# Altium PCB InterfazRS232Radio.PcbDoc
Units mm, origin at the board's own origin, x right, y up, seen from the top; angles counter-clockwise.
Board outline 40 x 30 mm, 2 copper layers (Top Layer, Bottom Layer); 18 components, 18 nets, 64 pads, 0 vias.
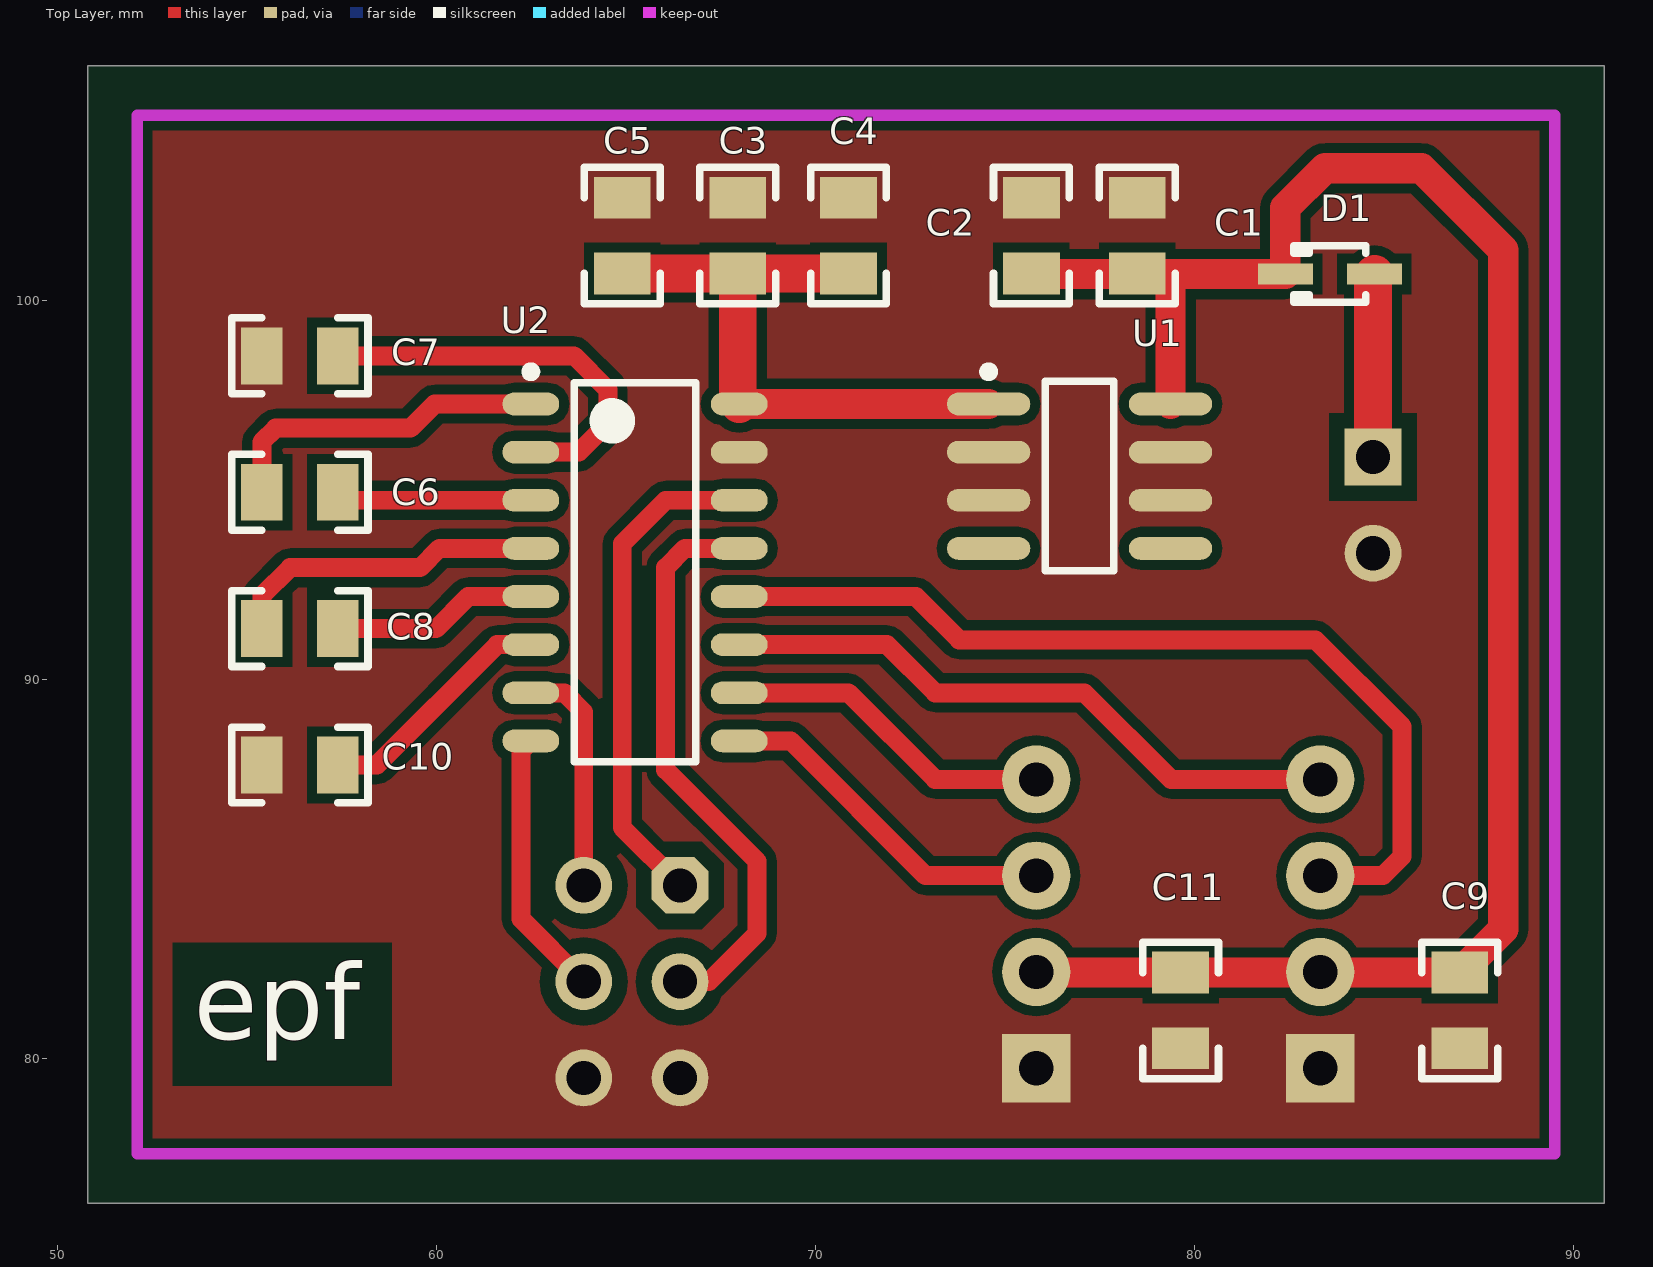
[diagram p0: Top Layer view]
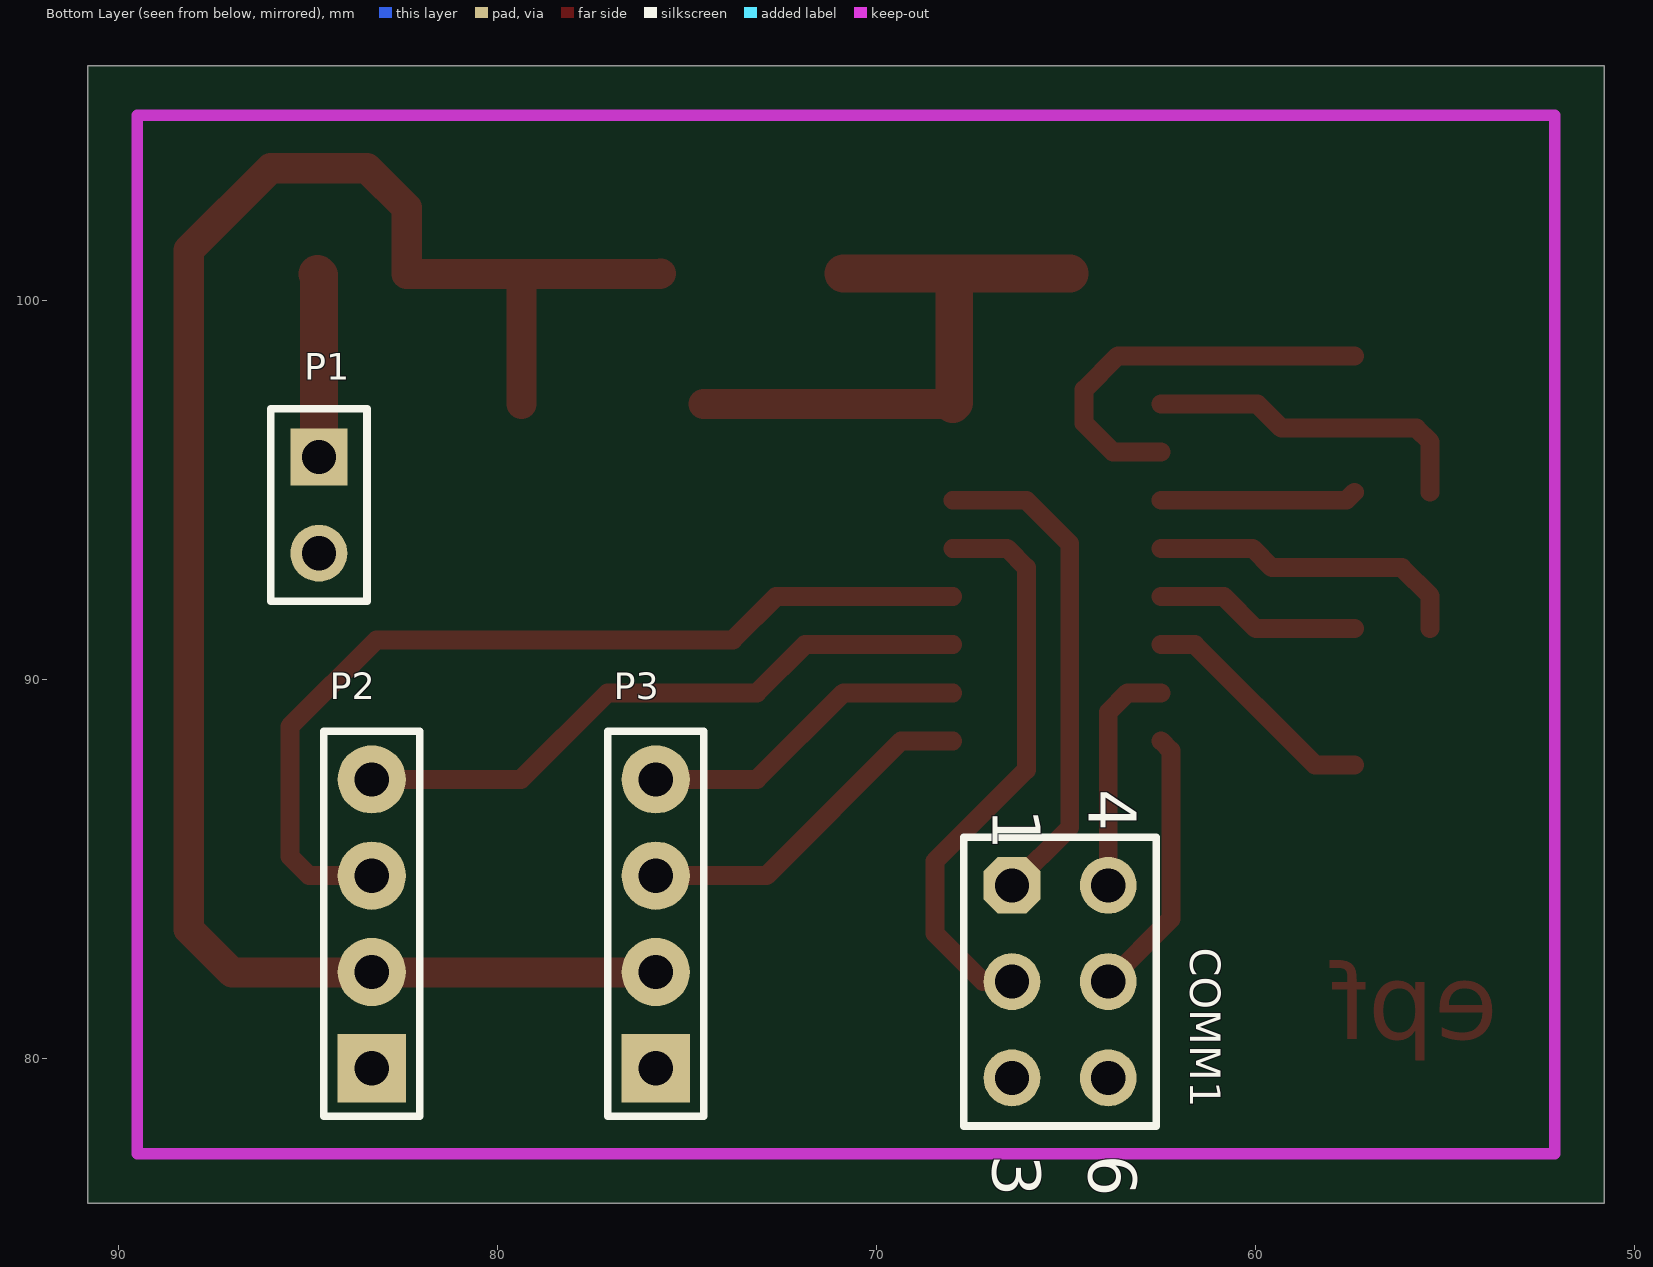
[diagram p1: Bottom Layer view, seen from below]

## Layer stack, top to bottom
Top Layer: signal copper 0.0356
Dielectric: dielectric 0.32, FR-4, Dk 4.8
Bottom Layer: signal copper 0.0356

## Board outline
50.8,76.2 90.8,76.2 90.8,106.2 50.8,106.2

## Design rules (kind name [scope] priority, off if disabled: settings)
Clearance [All] p1: gap=0.254
PlaneConnect [All] p1: planeconnectstyle=Direct reliefexpansion=0.508 reliefentries=4 reliefconductorwidth=0.254 reliefairgap=0.254
PolygonConnect [All] p1: connectstyle=Direct reliefconductorwidth=0.254 reliefentries=4 polygonreliefangle="90 Angle"
RoutingVias [All] p1: holewidth=0.6 width=1 viastyle="Through Hole" minholewidth=0.6 minwidth=0.9 maxholewidth=2 maxwidth=3
SilkscreenOverComponentPads [All] p1: minsilkscreentomaskgap=0.254
SolderMaskExpansion [All] p1: expansion=0.102
Width [All] p1: maxlimit=3 minlimit=0.2 preferedwidth=0.5
26 further rules are at their usual default settings.

## Components (designator, comment, footprint, x,y, rotation, side; value= is the part's Value field where it differs from the comment)
C1 "Capacitor" 0805_CAP 78.486,101.727 r90 top
C2 "Capacitor" 0805_CAP 75.692,101.727 r90 top
C3 "Capacitor" 0805_CAP 67.945,101.727 r90 top
C4 "Capacitor" 0805_CAP 70.866,101.727 r90 top
C5 "Capacitor" 0805_CAP 64.897,101.727 r270 top
C6 "Capacitor" 0805_CAP 56.388,94.954 r0 top
C7 "Capacitor" 0805_CAP 56.388,98.552 r0 top
C8 "Capacitor" 0805_CAP 56.388,91.355 r180 top
C9 "Capacitor" 0805_CAP 86.995,81.28 r270 top
C10 "Capacitor" 0805_CAP 56.388,87.757 r0 top
C11 "Capacitor" 0805_CAP 79.629,81.28 r270 top
COMM1 "AP_COMM" HDR2X3_CEN 66.421,84.582 r270 bottom
D1 "BAS316" SOD-323 83.566,100.711 r180 top
P1 "Header2" HEADER2MACHO 84.709,95.885 r270 bottom
P2 "Header 4" HDR1X4 83.312,79.756 r90 bottom
P3 "Header 4" HDR1X4 75.819,79.756 r90 bottom
U1 "µA78L05ACDR" D008_N 76.962,95.377 r0 top
U2 "MAX3232ESE" SOIC127P602-16BN 65.234,92.837 r0 top

## Footprints (in the part's own frame and the unit in brackets; to place one, negate y for a bottom-side part, rotate by r counter-clockwise, add the part's x,y. Pads: shape width x height; smd on the part's side, far side on the other; paste and mask are expansions set on the pad)
0805_CAP [mm]
  rect 1.1x1.5 smd: 1(-1,0) 2(1,0)
  silkscreen extent -1.8,-1 1.8,1, body extent -1,-0.62 1,0.63, height 0.78
D008_N [mm] "SOIC, 8-Leads, Body 4.9x3.9mm, Pitch 1.27mm, IPC Medium Density"
  oval 2.2x0.6 smd: 1(-2.4,1.905) 2(-2.4,0.635) 3(-2.4,-0.635) 4(-2.4,-1.905) 5(2.4,-1.905) 6(2.4,-0.635) 7(2.4,0.635) 8(2.4,1.905)
  silkscreen extent -2.52,-2.5 0.9,2.88, body extent -2,-2.5 2,2.5, height 1.75
HDR1X4 [mm] "Connector; Header; 4 Position"
  rect 1.8x1.8 hole 0.9: 1(0,0)
  round 1.8 hole 0.9: 2(2.54,0) 3(5.08,0) 4(7.62,0)
  silkscreen extent -1.27,-1.27 8.89,1.27
HDR2X3_CEN [mm] "Connector; Header; 3x2 Position"
  oct 1.5x1.5 hole 0.9: 1(0,0)
  round 1.5 hole 0.9: 2(2.54,0) 3(5.08,0) 4(0,2.54) 5(2.54,2.54) 6(5.08,2.54)
  silkscreen extent -1.27,-1.27 6.35,3.81, body extent -1.27,-1.27 6.33,3.81, height 8.55
HEADER2MACHO [mm]
  rect 1.5x1.5 hole 0.9: 1(0,0)
  round 1.5 hole 0.9: 2(2.54,0)
  silkscreen extent -1.27,-1.27 3.81,1.27, body extent -1.27,-1.25 3.81,1.25, height 8.55
SOD-323 [mm] "SOD-323/SC-76; 2 Leads; Body 1.7 x 1.3 mm, (LxW)"
  rect 1.45x0.55 smd: 1(1.175,0) 2(-1.175,0)
  silkscreen extent -0.95,-0.75 0.95,0.75, body extent -1.3,-0.67 1.3,0.68, height 1.1
SOIC127P602-16BN [mm] "SOIC, 16-Leads, Body 9.9x3.9mm, Pitch 1.27mm, IPC Medium Density"
  oval 1.5x0.6 smd: 1(-2.75,4.445) 2(-2.75,3.175) 3(-2.75,1.905) 4(-2.75,0.635) 5(-2.75,-0.635) 6(-2.75,-1.905) 7(-2.75,-3.175) 8(-2.75,-4.445) 9(2.75,-4.445) 10(2.75,-3.175) 11(2.75,-1.905) 12(2.75,-0.635) 13(2.75,0.635) 14(2.75,1.905) 15(2.75,3.175) 16(2.75,4.445)
  silkscreen extent -2.87,-5 1.6,5.42, body extent -3,-5.1 3,5.1, height 1.7

## Part data
C1 C2 C3 C4 C5 C6 C7 C8 C9 C10 C11: library part Cap
COMM1: "Header, 3-Pin, Dual row"
P2 P3: "Header, 4-Pin"
U1: "Positive-Voltage Regulator"
U2: library part MAX3232ESE+

## Nets (pads, with @x,y where several pads share a name; then routed paths per layer and width w, separated by ;. In a path a pad name is that pad's centre, name@x,y a point inside that pad or via, vN(x,y) a via of type N, cw(c..) or ccw(c..) an arc to the next point about the centre after c; other vN are vias at no path point)
5V: C3.1 C4.1 C5.2 U1.1 U2.16 | length 16
  Top Layer w0.8: U2.16 U1.1
  Top Layer w1: C5.2 C3.1 ; U2.16 67.945,97.321 C3.1 ; C4.1 C3.1
GND: C1.2 C2.2 C3.2 C4.2 C5.1 C7.1 C9.2 C10.1 C11.2 COMM1.3 COMM1.6 P1.2 P2.1 P3.1 U1.2 U1.3 U1.6 U1.7 U2.15
NetC6_1: C6.1 U2.1 | length 8.8
  Top Layer w0.5: C6.1 55.388,96.282 55.753,96.647 59.309,96.647 59.944,97.282 U2.1
NetC6_2: C6.2 U2.3 | length 5.2
  Top Layer w0.5: C6.2 57.6,94.742 U2.3
NetC7_2: C7.2 U2.2 | length 10.7
  Top Layer w0.5: C7.2 63.627,98.552 64.516,97.663 64.516,96.774 63.754,96.012 U2.2
NetC8_1: C8.1 U2.5 | length 5.4
  Top Layer w0.5: C8.1 59.986,91.355 60.833,92.202 U2.5
NetC8_2: C8.2 U2.4 | length 8.5
  Top Layer w0.5: C8.2 55.388,92.218 56.134,92.964 59.563,92.964 60.071,93.472 U2.4
NetC10_2: C10.2 U2.6 | length 6.4
  Top Layer w0.5: C10.2 58.42,87.757 61.595,90.932 U2.6
NetD1_2: D1.2 P1.1 | length 4.8
  Top Layer w1: P1.1 84.709,100.679 D1.2
RXD1: P2.3 U2.12 | length 24.7
  Top Layer w0.5: U2.12 72.644,92.202 73.787,91.059 83.185,91.059 85.471,88.773 85.471,85.344 84.963,84.836 P2.3
RXD2: P3.3 U2.9 | length 9.3
  Top Layer w0.5: U2.9 69.342,88.392 72.898,84.836 P3.3
TXD1: P2.4 U2.11 | length 16.8
  Top Layer w0.5: U2.11 71.882,90.932 73.152,89.662 77.089,89.662 79.375,87.376 P2.4
TXD2: P3.4 U2.10 | length 8.8
  Top Layer w0.5: U2.10 70.866,89.662 73.152,87.376 P3.4
URXD1: COMM1.2 U2.13 | length 15.4
  Top Layer w0.5: COMM1.2 67.183,82.042 68.453,83.312 68.453,85.217 66.04,87.63 66.04,92.964 66.548,93.472 U2.13
URXD2: COMM1.5 U2.8 | length 7.1
  Top Layer w0.5: U2.8 62.23,88.138 62.23,83.693 COMM1.5
UTXD1: COMM1.1 U2.14 | length 13.2
  Top Layer w0.5: COMM1.1 64.897,86.106 64.897,93.599 66.04,94.742 U2.14
UTXD2: COMM1.4 U2.7 | length 6.2
  Top Layer w0.5: U2.7 63.373,89.662 63.881,89.154 COMM1.4
VCC: C1.1 C2.1 C9.1 C11.1 D1.1 P2.2 P3.2 U1.8 | length 49.7
  Top Layer w0.8: C2.1 75.708,100.711 79.375,100.711 ; P3.2 75.835,82.28 C11.1 C9.1 88.138,83.423 88.138,101.346 85.979,103.505 83.439,103.505 82.391,102.457 D1.1 79.375,100.711 ; U1.8 79.362,100.698 79.375,100.711
pads on no net: U1.4 U1.5

## Polygon pours and split planes (outlines as drawn)
GND on Top Layer "TOPGND" (solid, remove dead copper, pour order 2): 52.1,104.9 52.1,77.597 89.403,77.597 89.5,77.5 89.5,104.9

## Keep-outs
Keep-Out Layer:
  lines w0.3: 52.1,77.5 89.5,77.5 89.5,104.9 52.1,104.9 52.1,77.5

## Other copper
Top Layer:
  text "epf" at 53.594,80.518 h2

## Silkscreen, mask and mechanical layers (free items; w line width, h text height)
Top Overlay:
  text "epf" at 53.594,80.518 h2

## Dimensions
52.1,77.5 to 89.5,77.5 on Mechanical 1
52.1,77.5 to 52.1,104.9 on Mechanical 1

## Text inside footprints (layer, text, board x,y; h text height)
COMM1: Bottom Overlay "6" at 64.389,77.47 h1.27 r90; Bottom Overlay "3" at 66.929,77.47 h1.27 r90; Bottom Overlay "1" at 66.929,86.614 h1.27 r90; Bottom Overlay "4" at 64.389,87.122 h1.27 r90